# Altium PCB PCB1.PcbDoc
Units mil, origin at the board's own origin, x right, y up, seen from the top; angles counter-clockwise.
Board outline 1960.65 x 616 mil, 2 copper layers (Top Layer, Bottom Layer); 30 components, 31 nets, 157 pads, 75 vias.
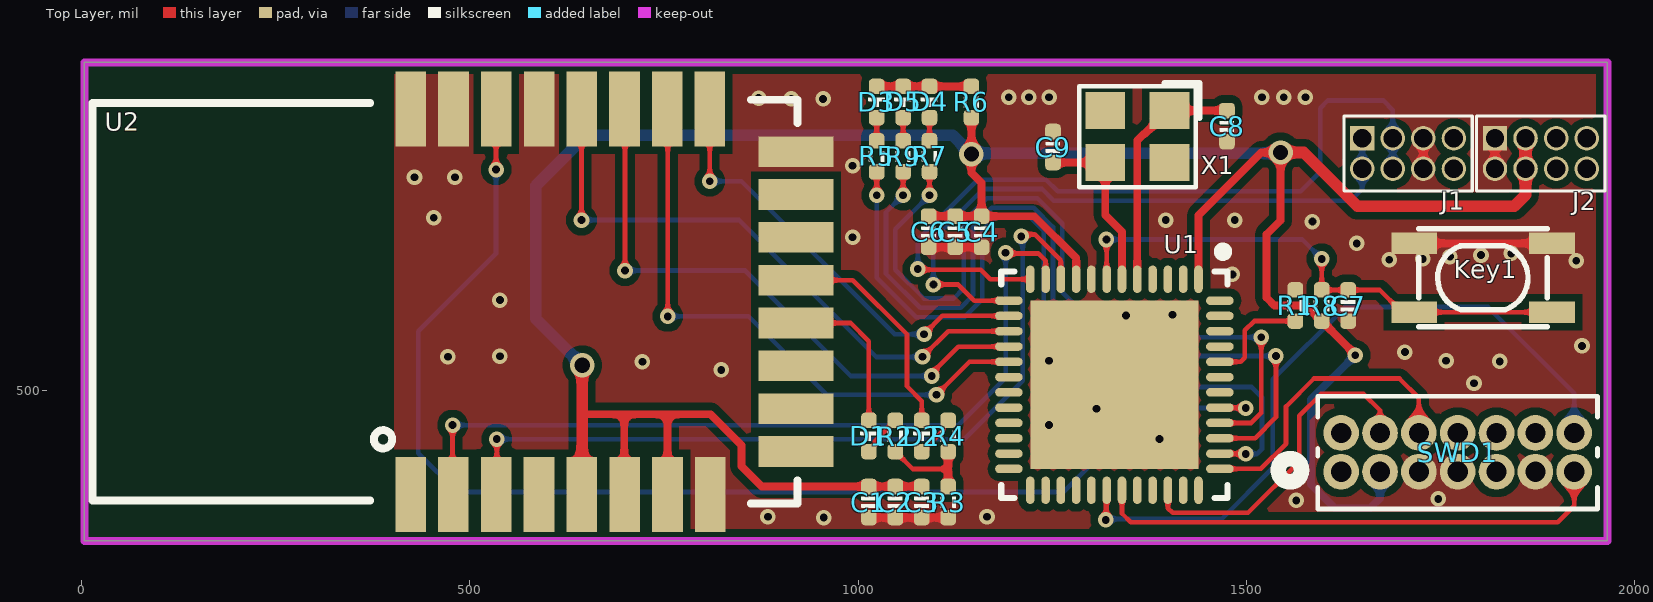
[diagram p0: Top Layer view]
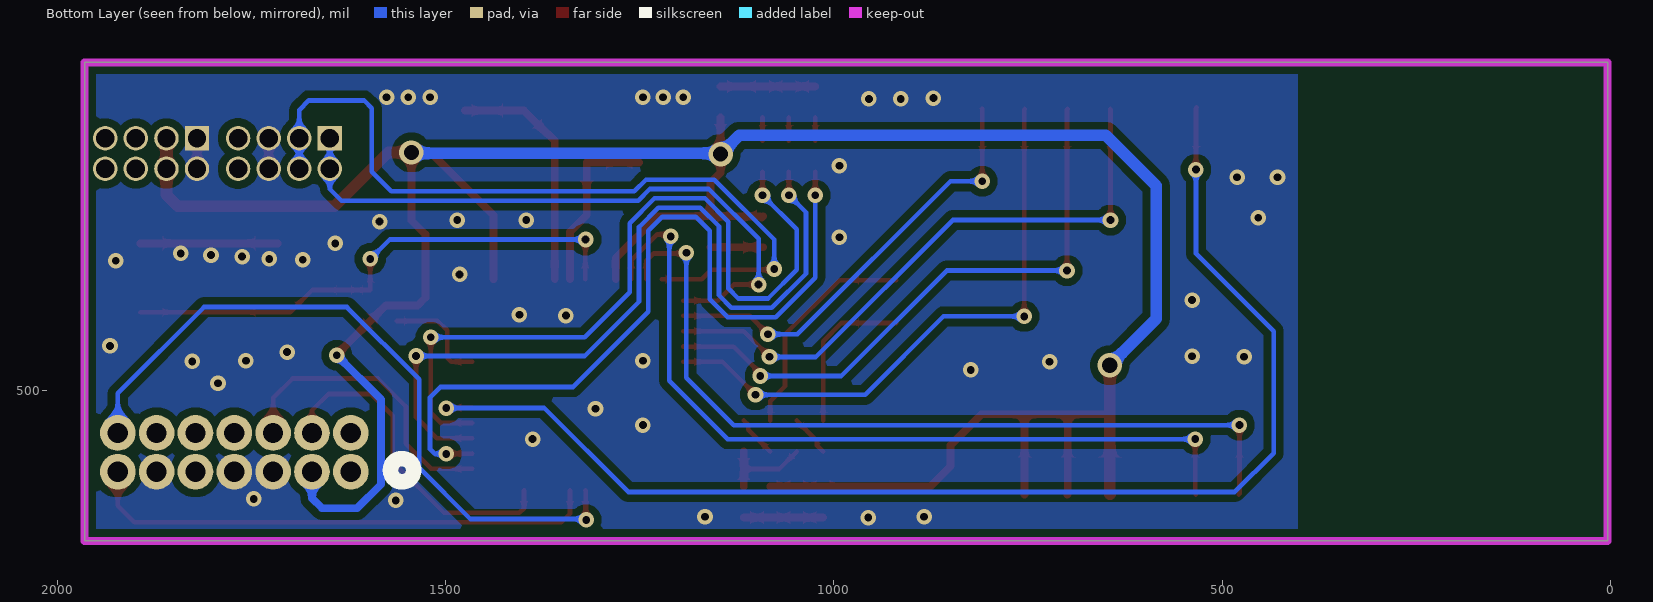
[diagram p1: Bottom Layer view, seen from below]
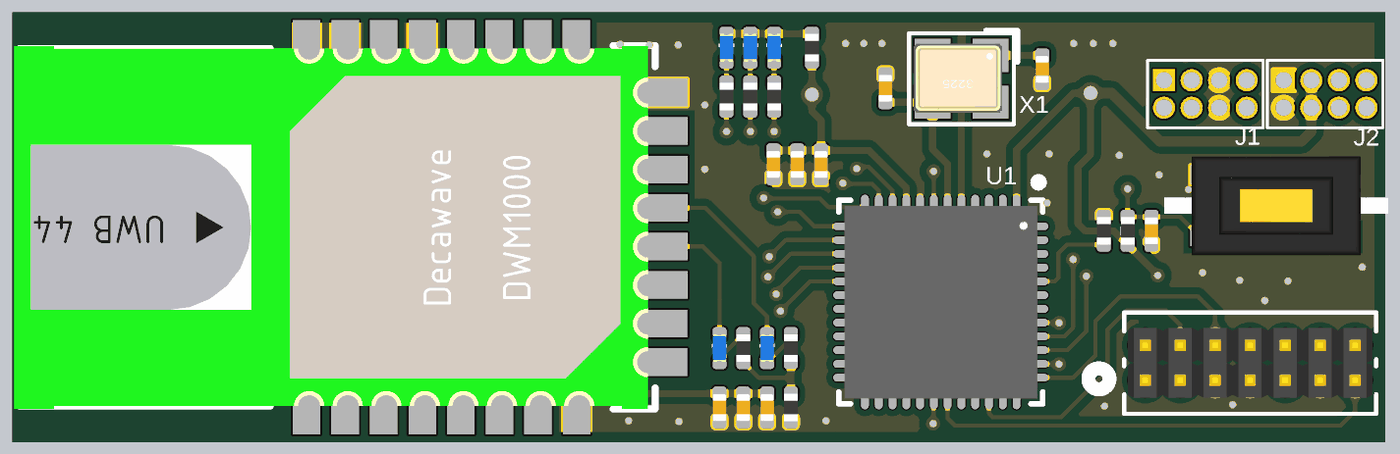
[diagram p2: 3D render of the assembled board from above, using the file's embedded part models]

## Layer stack, top to bottom
Top Solder: solder mask 0.4, Solder Resist, Dk 3.5
Top Layer: signal copper 1.4
Dielectric 1: dielectric 12.6, FR-4, Dk 4.8
Bottom Layer: signal copper 1.4
Bottom Solder: solder mask 0.4, Solder Resist, Dk 3.5

## Board outline
4,306 4,922 1964.65,922 1964.65,306

## Design rules (kind name [scope] priority, off if disabled: settings)
BoardOutlineClearance [All] p1: gap=0 ignorepadtopadclearanceinfootprint=FALSE
Clearance Polygon [(InPolygon)] p1: gap=10 ignorepadtopadclearanceinfootprint=TRUE
Clearance [All] p2: gap=5 ignorepadtopadclearanceinfootprint=TRUE except(6: Arc-Arc Arc-Track Track-Track; 9.84: Arc-Hole Track-Hole SMDPad-Hole THPad-Hole Via-Hole Fill-Hole Poly-Hole Region-Hole Text-Hole)
ComponentClearance [All] p1 off: gap=5 collisioncheckmode=3 verticalgap=5 showdistances=TRUE
DiffPairsRouting [All] p1: maxlimit=10 minlimit=5 mostfreqgap=5 toplayer_minwidth=5 toplayer_maxwidth=1000 toplayer_prefwidth=5 bottomlayer_minwidth=5 bottomlayer_maxwidth=1000 bottomlayer_prefwidth=5 maxuncoupledlength=500
Height [All] p1: minheight=0 maxheight=71497.94 prefheight=500
HoleSize [All] p1: absolutevalues=TRUE maxlimit=248.03 minlimit=7.87 maxpercent=80.000 minpercent=20.000
HoleToHoleClearance [All] p1: gap=10 allowstackedmicrovias=FALSE
MinimumAnnularRing [All] p1: minimumring=3
MinimumSolderMaskSliver [All] p1: minsoldermaskwidth=0
PlaneClearance [All] p1: clearance=5
PlaneConnect PlaneConnectPowerPads [InPadClass('PowerPads')] p1: planeconnectstyle=Direct reliefexpansion=20 reliefentries=4 reliefconductorwidth=10 reliefairgap=10
PlaneConnect [All] p2: pad.planeconnectstyle=Relief pad.reliefexpansion=11.81 pad.reliefentries=4 pad.reliefconductorwidth=5 pad.reliefairgap=5 via.planeconnectstyle=Direct via.reliefexpansion=11.81 via.reliefentries=4 via.reliefconductorwidth=5 via.reliefairgap=5
PolygonConnect PolygonConnect_via [isvia] p1: connectstyle=Direct reliefconductorwidth=10 reliefentries=4 polygonreliefangle="90 Angle" airgapwidth=10
PolygonConnect PolygonConnect_Direct [InNet('VBattery') or InNet('NetL1_1') or InNet('NetL1_2') or InNet('NetC2_2') or InNet('Vin')or InNet('NetC8_2')or InNet('VCC_5V') or InNet('NetR3_2') or InNet('NetL2_2')or InNet('VB')or InNet('VBLOAD') or InNet('V_Charge')or InNet('NetC7_2') or InNet('VCC_Supply') or InNet('GNDA')or InNet('GND')or InNet('NetD5_A')] p2: connectstyle=Direct reliefconductorwidth=10 reliefentries=4 polygonreliefangle="90 Angle" airgapwidth=10
PolygonConnect [All] p3: connectstyle=Relief reliefconductorwidth=10 reliefentries=4 polygonreliefangle="90 Angle" airgapwidth=10
RoutingVias [All] p1: holewidth=11.81 width=23.62 viastyle="Through Hole" minholewidth=7.87 minwidth=19.68 maxholewidth=23.62 maxwidth=259.84
SilkToSilkClearance [All] p1: silktosilkclearance=0
SilkToSolderMaskClearance [IsPad] p1: minsilkscreentomaskgap=0 clearancetoexposedcopper=TRUE
SolderMaskExpansion [All] p1: expansion=2.95 istentingtop=FALSE
Width [All] p1: maxlimit=1000 minlimit=5 preferedwidth=5 minimp=50.000000 maximp=50.000000 favimp=50.000000
20 further rules are at their usual default settings.

## Components (designator, comment, footprint, x,y, rotation, side; value= is the part's Value field where it differs from the comment)
C1 "100nF" CAP_0402 1014,356 r90 top value=0.1u
C2 "100nF" CAP_0402 1048,356 r90 top value=0.1u
C3 "10uF" CAP_0402 1082,356 r90 top value=0.1u
C4 "100nF" CAP_0402 1159,704 r90 top value=0.1u
C5 "100nF" CAP_0402 1125,704 r90 top value=0.1u
C6 "10uF" CAP_0402 1091,704 r90 top value=0.1u
C7 "100nF" CAP_0402 1631,609 r90 top value=0.1u
C8 "22pF" CAP_0402 1475,840 r90 top value=0.1u
C9 "22pF" CAP_0402 1251,813 r270 top value=0.1u
D1 "color?" LED_0402 1014,441 r270 top
D2 "color?" LED_0402 1082,441 r270 top
D3 "color?" LED_0402 1024,871 r270 top
D4 "color?" LED_0402 1092,871 r270 top
D5 "color?" LED_0402 1058,871 r270 top
J1 "排针/排母 1mm" 排针/排母1.0MM_4PX2 1625.38,852.91 r0 top
J2 "排针/排母 1mm" 排针/排母1.0MM_4PX2 1796.38,852.91 r0 top
Key1 "S-KEY-SMD-324225" KEY-SOP324225 1716,600.42 r180 top
R1 "10K" RES_0402 1563,609 r90 top value=22R
R2 "4.7K" RES_0402 1048,441 r270 top value=22R
R3 "0R" RES_0402 1116,356 r270 top value=22R
R4 "4.7K" RES_0402 1116,441 r270 top value=22R
R5 "2K" RES_0402 1024,801 r270 top value=22R
R6 "0R" RES_0402 1146,871 r90 top value=22R
R7 "2K" RES_0402 1092,801 r270 top value=22R
R8 "10K" RES_0402 1597,609 r90 top value=22R
R9 "2K" RES_0402 1058,801 r270 top value=22R
SWD1 "STDC14(SWD)" STDC14 1730,451 r0 top
U1 "STM32L431CCU6_UFQFPN48" UFQFPN-48_L7.0-W7.0-P0.50-BL-EP 1330,507 r180 top locked value=Value
U2 "DWM3000" DWM1000 672.01,613.95 r90 top
X1 "XTAL-4P" "OSC 3225-4P" 1359.66,826.46 r180 top

## Footprints (in the part's own frame and the unit in brackets; to place one, negate y for a bottom-side part, rotate by r counter-clockwise, add the part's x,y. Pads: shape width x height; smd on the part's side, far side on the other; paste and mask are expansions set on the pad)
CAP_0402 [mil]
  rrect50% 20x20 smd: 1(-20,0) 2(20,0)
  silkscreen extent -7,-9 7,9, body extent -20,-10 20,10, height 20
DWM1000 [mm]
  rect 2.45x1 smd: 1(-6.301,6.299) 2(-6.304,4.901) 3(-6.305,3.501) 4(-6.304,2.101) 5(-6.3,0.698) 6(-6.304,-0.702) 7(-6.301,-2.099) 8(-6.304,-3.5) 17(6.305,-3.488) 18(6.301,-2.093) 19(6.3,-0.693) 20(6.3,0.701) 21(6.299,2.1) 22(6.298,3.5) 23(6.3,4.898) 24(6.3,6.299)
  rect 1x2.45 smd: 9(-4.9,-6.295) 10(-3.497,-6.297) 11(-2.097,-6.299) 12(-0.697,-6.299) 13(0.703,-6.299) 14(2.103,-6.299) 15(3.503,-6.299) 16(4.903,-6.298)
  silkscreen extent -6.6,-6.35 6.6,16.7, body extent -6.6,-6.1 6.6,16.9, height 2.9
KEY-SOP324225 [mm]
  rect 1.5x0.7 smd: 1(-4.5,0) 1(0,0) 2(-4.5,-2.25) 2(0,-2.25)
  silkscreen extent -4.35,-2.73 -0.15,0.48, body extent -6.44,-2.93 1.7,0.67, height 2.49
LED_0402 [mil]
  rrect50% 20x20 smd: A(-20,0) K(20,0)
  silkscreen extent -6,-11 6,10, body extent -20,-10 20,10, height 18
"OSC 3225-4P" [mm]
  rect 1.3x1.2 smd: 1(-1.05,-0.85) 2(1.05,-0.85) 3(1.05,0.85) 4(-1.05,0.85)
  silkscreen extent -2.03,-1.75 1.91,1.65, body extent -1.47,-1.27 1.73,1.23, height 0.7
RES_0402 [mil]
  rrect50% 20x20 smd: 1(-20,0) 2(20,0)
  silkscreen extent -7,-10 7,10, body extent -20,-10 20,10, height 14
STDC14 [mil]
  round 46 hole 26: 1(-108,-56) 2(-108,-6) 3(-58,-56) 4(-58,-6) 5(-8,-56) 6(-8,-6) 7(42,-56) 8(42,-6) 9(92,-56) 10(92,-6) 11(142,-56) 12(142,-6) 13(192,-56) 14(192,-6)
  silkscreen extent -189,-104 222,41, body extent -133,-81 217,19, height 255
UFQFPN-48_L7.0-W7.0-P0.50-BL-EP [mil]
  oval 11x35.4 smd mask+2: 1(-108.3,-135.8) 2(-88.6,-135.8) 3(-68.9,-135.8) 4(-49.2,-135.8) 5(-29.5,-135.8) 6(-9.8,-135.8) 7(9.8,-135.8) 8(29.5,-135.8) 9(49.2,-135.8) 10(68.9,-135.8) 11(88.6,-135.8) 12(108.3,-135.8) 25(108.3,135.8) 26(88.6,135.8) 27(68.9,135.8) 28(49.2,135.8) 29(29.5,135.8) 30(9.8,135.8) 31(-9.8,135.8) 32(-29.5,135.8) 33(-49.2,135.8) 34(-68.9,135.8) 35(-88.6,135.8) 36(-108.3,135.8)
  oval 35.4x11 smd mask+2: 13(135.8,-108.3) 14(135.8,-88.6) 15(135.8,-68.9) 16(135.8,-49.2) 17(135.8,-29.5) 18(135.8,-9.8) 19(135.8,9.8) 20(135.8,29.5) 21(135.8,49.2) 22(135.8,68.9) 23(135.8,88.6) 24(135.8,108.3) 37(-135.8,108.3) 38(-135.8,88.6) 39(-135.8,68.9) 40(-135.8,49.2) 41(-135.8,29.5) 42(-135.8,9.8) 43(-135.8,-9.8) 44(-135.8,-29.5) 45(-135.8,-49.2) 46(-135.8,-68.9) 47(-135.8,-88.6) 48(-135.8,-108.3)
  rect 216.5x216.5 smd mask+2: 49(0,0)
  silkscreen extent -146,-177 146,146, body extent -138,-138 138,138, height 22
排针/排母1.0MM_4PX2 [mm] "1.0mm引脚间距排针/排母，直插式"
  rect 0.8x0.8 hole 0.6: 1(0.6,-0.725)
  round 0.8 hole 0.6: 2(1.6,-0.725) 3(2.6,-0.725) 4(3.6,-0.725) 5(3.6,-1.725) 6(2.6,-1.725) 7(1.6,-1.725) 8(0.6,-1.725)
  silkscreen extent 0,-2.45 4.2,0

## Part data
C1 C2 C3 C4 C5 C6 C7 C8 C9: library part 电容-0402, "Capacitor"
D1 D2 D3 D4 D5: library part LED_0402, "LED", Type=0402
J1 J2: "1mm间距"
Key1: library part KEY-SMD-324225, "KEY,SMD,324225"
R1 R2 R3 R4 R5 R6 R7 R8 R9: library part 电阻-0402, "Resistor"
SWD1: "For STLINK_V3SET"
U1: "STM32L431CCU6【C1337258】", Manufacturer_Part_Number=stm32l4_lqfp64_t7, Built_By=EMA_Jessica, Copyright="Copyright (C) 2016 Accelerated Designs. All rights reserved", RefDes=RefDes, Type=Type, Vendor=STMicroelectronics
X1: "4脚无源晶振"

## Via types
v1: diameter 20, hole 10, Top Layer to Bottom Layer, tented both sides, 72 vias
v2: diameter 31.5, hole 19.68, Top Layer to Bottom Layer, 3 vias

## Nets (pads, with @x,y where several pads share a name; then routed paths per layer and width w, separated by ;. In a path a pad name is that pad's centre, name@x,y a point inside that pad or via, vN(x,y) a via of type N, cw(c..) or ccw(c..) an arc to the next point about the centre after c; other vN are vias at no path point)
DW_IRQn: U1.41 U2.22 | length 1651.9
  Top Layer w6: U2.22@533,864 U2.22@534,863 ; v1(534,784) U2.22@534,863 ; U2.22 534.23,862.77 U2.22@534,863 ; U1.41 1466.05,477.25 1498.75,477.25 v1(1499,477)
  Bottom Layer w6: v1(534,784) 534,676 434,576 434,419 484,369 1265,369 1373.06,477.06 1498.94,477.06 v1(1499,477)
DW_LED1: D1.A U2.12 | length 205.7
  Top Layer w6: U2.12 990.49,586.51 1014,563 D1.A
DW_LED2: D2.A U2.13 | length 290.7
  Top Layer w6: U2.13 993.37,641.63 1063,572 1063,505 1082,486 D2.A
DW_MISO: U1.16 U2.19 | length 776.6
  Top Layer w6: U2.19 700,861.28 v1(700,654) ; v1(1095,518.27) 1095,522 1129.1,556.1 1194.1,556.1 U1.16
  Bottom Layer w6: v1(700,654) 855,654 990.73,518.27 v1(1095,518.27)
DW_MOSI: U1.17 U2.18 | length 765.9
  Top Layer w6: U2.18 755,861.44 v1(755,595) ; v1(1101,494) 1143.5,536.5 U1.17
  Bottom Layer w6: v1(755,595) 859,595 960,494 v1(1101,494)
DW_NSS: U1.14 U2.17 | length 569.9
  Top Layer w6: v1(809,769) 809,861.83 U2.17 ; v1(1085,572) 1108.6,595.6 U1.14
  Bottom Layer w6: v1(809,769) 850,769 1047,572 v1(1085,572)
DW_RSTn: U1.10 U2.3 | length 1056.8
  Top Layer w6: U2.3 535,366.56 v1(535,437) ; v1(1210,698) 1212.68,700.68 1227.32,700.68 1260.95,667.05 1260.95,642.95 U1.10
  Bottom Layer w6: v1(535,437) 1137,437 1212,512 1212,696 v1(1210,698)
DW_SCK: U1.15 U2.20 | length 780.2
  Top Layer w6: v1(644,719) 644,861.58 U2.20 ; v1(1083,543) 1115.95,575.95 1194.15,575.95 U1.15
  Bottom Layer w6: v1(644,719) 847,719 1023.27,542.73 1082.73,542.73 v1(1083,543)
DW_WUP: U1.11 U2.2 | length 1067.4
  Top Layer w6: v1(478,455) 478,366.85 U2.2 ; v1(1190,677) 1191,676 1232,676 1241.4,666.6 U1.11
  Bottom Layer w6: v1(478,455) 1129,455 1190,516 v1(1190,677)
GND: C1.1 C2.1 C3.1 C4.1 C5.1 C6.1 C7.1 C8.1 C9.1 J1.3 J1.6 J2.1 J2.8 Key1.2 R1.2 R3.2 SWD1.5 SWD1.7 SWD1.11 U1.8 U1.49 U2.8 U2.16 U2.21 U2.23 U2.24 | length 425.9
  Top Layer w10: C1.1 C2.1 C3.1 R3.2 ; C6.1 C5.1 C4.1 ; Key1.2@1716,689 Key1.2@1893.17,689 ; J1.6 J1.3 ; J2.8 J2.1
  other v1: 956,336 884,337 1166,337 1564,358 1747,360 1388,437 1246,455 1307,476 1793,509 824,526 722.44,536.51 1826,537 1246,538 1757,538 472,543 539.01,543.62 1704,549 1932,557 1345,596 1405,597 539,616 1482,649 1924.73,666.53 1684,668 1727,669 1762,672 1802,674 1841,676 1642,689 993,697 1585,717 1396,719 1485,719 453.77,721.98 429,774 481,774 993,789 914,875 955,875 872,876 1194,877 1220,877 1246,877 1520,877 1548,877 1576,877
LED1: R5.2 U1.38 | length 1039
  Top Layer w6: v1(1024,751) R5.2 ; U1.38 1466,418.2 1498.8,418.2 v1(1499,418)
  Bottom Layer w6: v1(1024,751) 1024,645 1075,594 1136.97,594 1160,617.03 1160,705 1178,723 1221.06,723 1239,705.06 1239,601 1336,504 1507,504 1520,491 1520,424 1514,418 v1(1499,418)
LED2: R7.2 U1.40 | length 1016.5
  Top Layer w6: v1(1092,751) R7.2 ; U1.40 1506.14,457.8 1519,470.66 v1(1519,568)
  Bottom Layer w6: v1(1092,751) 1048,707 1048,654.94 1084.94,618 1123,618 1136,631 1136,717 1166,747 1231,747 1263,715 1263,626 1321,568 v1(1519,568)
LED3: R9.2 U1.39 | length 1063.6
  Top Layer w6: v1(1058,751) R9.2 ; U1.39 1511.1,438.1 1538,465 v1(1538,544)
  Bottom Layer w6: v1(1058,751) 1036,729 1036,649.97 1079.97,606 1132,606 1148,622 1148,711 1172,735 1226.03,735 1251,710.03 1251,614 1321,544 v1(1538,544)
MCU_RST: C7.2 Key1.1 R8.2 U1.7 | length 686.9
  Top Layer w6: v1(1319.8,694) 1320,693.8 1320,643 U1.7 ; v1(1597,669) R8.2 C7.2 1671.67,629 1700.25,600.42 1716,600.42 Key1.1@1893.17,600.42
  Bottom Layer w6: v1(1319.8,694) 1572,694 v1(1597,669)
NetD1_K: D1.K R2.1 | length 54.1
  Top Layer w6: D1.K 1022,429 1022,435 R2.1
NetD2_K: D2.K R4.1 | length 54.1
  Top Layer w6: D2.K 1110.23,449.23 1110.23,455.23 R4.1
NetD3_A: D3.A D4.A D5.A R6.2 | length 122
  Top Layer w10: D3.A D5.A D4.A R6.2
NetD3_K: D3.K R5.1 | length 30
  Top Layer w6: R5.1 D3.K
NetD4_K: D4.K R7.1 | length 30
  Top Layer w6: R7.1 D4.K
NetD5_K: D5.K R9.1 | length 30
  Top Layer w6: R9.1 D5.K
NetR1_1: R1.1 U1.44 | length 139.4
  Top Layer w6: U1.44 1492.5,536.5 1498,542 1498,577 1510,589 R1.1
NetR2_2: R2.2 R3.1 R4.2 | length 122.3
  Top Layer w6: R2.2 1070.5,398.5 1116,398.5
  Top Layer w10: R3.1 1116,398.5 R4.2
OSC_IN: C8.2 U1.5 X1.1 | length 310.1
  Top Layer w10: U1.5 1359.5,821.4 1367.84,829.74 1368.84,829.74 1399.03,859.93 X1.1 1401.07,860 C8.2
OSC_OUT: C9.2 U1.6 X1.3 | length 226.4
  Top Layer w10: C9.2 X1.3 1318.32,725.56 1339.8,704.09 U1.6
SWCLK: SWD1.6 U1.37 | length 387.8
  Top Layer w6: U1.37 1518.7,398.7 1551,431 1551,479 1587,515 1697,515 1722,490 SWD1.6
SWDIO: SWD1.4 U1.34 | length 434.5
  Top Layer w6: U1.34 1399,371.1 1399,348 1405,342 1502,342 1568,408 1568,467 1596,495 1651.26,495 1672,474.25 SWD1.4
USART1_RX: SWD1.13 U1.31 | length 669.5
  Top Layer w6: U1.31 1339.8,341.2 1351,330 1901,330 1922,351 SWD1.13
USART1_TX: SWD1.14 U1.30 | length 918.9
  Top Layer w6: v1(1319,333) 1319.6,333.6 1319.6,370.6 U1.30
  Bottom Layer w6: v1(1319,333) 1320.13,334.13 1468.13,334.13 1534,400 1534,514 1627,607 1811,607 1922,496 SWD1.14
USART2_RX: J1.1 J1.8 U1.13 | length 821.1
  Top Layer w6: v1(1097,636) 1129,636 1149.7,615.3 U1.13
  Bottom Layer w6: v1(1097,636) 1097,694.97 1161.03,759 1237.03,759 1252.03,744 1634,744 1649,759 J1.8 J1.1
USART2_TX: J1.2 J1.7 U1.12 | length 1014.9
  Top Layer w6: v1(1077,656) 1078,655 1158,655 1170.2,642.8 U1.12
  Bottom Layer w6: v1(1077,656) 1077,694 1154,771 1242,771 1257,756 1570,756 1595,781 1595,863 1605,873 1676,873 1688.37,860.63 J1.2 J1.7
VCC_3V3: C1.2 C2.2 C3.2 C4.2 C5.2 C6.2 J2.2 J2.7 R6.1 R8.1 SWD1.3 U1.1 U1.9 U2.5 U2.6 U2.7 | length 3805.7
  Top Layer w10: 644.76,468.76 645,469 810,469 850,429 850,402 876,376 C1.2 C2.2 C3.2 ; 699,469 699,366.41 U2.6 ; U2.7 754.66,469 ; C6.2 1093,722 1095,724 C5.2 C4.2 ; R6.1 v2(1146,804) 1146,780 1159,767 C4.2 ; U1.9 1280.8,670.2 1227,724 C4.2 ; U1.1 1438.3,725.3 1519,806 v2(1544,806) 1544,718.59 1526,700.59 1526,619 1536,609 1577,609 1640,546 v1(1640,545)
  Top Layer w15: U2.5 644.76,366.17 644.76,468.76 644.76,531.76 v2(645,532) ; v2(1544,806) 1574,806 1643,737 1845,737 1859.37,751.37 J2.7 J2.2
  Bottom Layer w10: v2(1146,804) v2@1147,805 ; v2@1543,805 v2(1544,806) ; v1(1640,545) 1583,488 1583,379 1614,348 1659,348 1672,361 SWD1.3
  Bottom Layer w15: v2(645,532) 585,592 585,763 650,828 1122,828 v2(1146,804) ; v2@1147,805 v2@1543,805
pads on no net: J1.4 J1.5 J2.3 J2.4 J2.5 J2.6 SWD1.1 SWD1.2 SWD1.8 SWD1.9 SWD1.10 SWD1.12 U1.2 U1.3 U1.4 U1.18 U1.19 U1.20 U1.21 U1.22 U1.23 U1.24 U1.25 U1.26 U1.27 U1.28 U1.29 U1.32 U1.33 U1.35 U1.36 U1.42 U1.43 U1.45 U1.46 U1.47 U1.48 U2.1 U2.4 U2.9 U2.10 U2.11 U2.14 U2.15 X1.2 X1.4

## Polygon pours and split planes (outlines as drawn)
GND on Bottom Layer "GND_L02_P001" (solid, remove dead copper, pour order 1): 401.6,921.77 403,920.37 403,306 1964,306 1964,922
GND on Top Layer "GND_L01_P000" (solid, remove dead copper, pour order 0): 401.6,921.77 403,920.37 403,306 1964,306 1964,922

## Keep-outs
Keep-Out Layer:
  lines w10: 4,306 94,306 1965,306 1965,922 4,922 4,306

## Silkscreen, mask and mechanical layers (free items; w line width, h text height)
Mechanical 1:
  lines w3.94: 4,306 4,415 4,476 4,922 1964.65,922 1964.65,476 1964.65,402 1964.65,306 4,306
Drill Drawing:
  circle w10: c2226.62,528.83 r33.33
  lines w10: 2193.29,645.5 2259.96,645.5 2259.96,712.17 2193.29,712.17 2193.29,645.5 ; 2193.29,962.17 2209.96,962.17 2226.62,945.5 2243.29,962.17 2259.96,962.17 2243.29,978.83 2259.96,995.5 2243.29,995.5 2226.62,1012.17 2209.96,995.5 2193.29,995.5 2209.96,978.83 2193.29,962.17
  lines w15: 2133.5,450.5 12754.55,450.5 ; 2133.5,1050.5 12754.55,1050.5 ; 2684.38,300.5 2684.38,1200.5 ; 3274.22,300.5 3274.22,1200.5 ; 4373.9,300.5 4373.9,1200.5 ; 4879.78,300.5 4879.78,1200.5 ; 5613.58,300.5 5613.58,1200.5 ; 7113.13,300.5 7113.13,1200.5 ; 7702.98,300.5 7702.98,1200.5 ; 8448.78,300.5 8448.78,1200.5 ; 9188.57,300.5 9188.57,1200.5 ; 10042.33,300.5 10042.33,1200.5 ; 11375.94,300.5 11375.94,1200.5 ; 2133.5,300.5 12754.55,300.5 12754.55,1200.5 2133.5,1200.5 2133.5,300.5
  text "Symbol" at 2223.5,1095.5 h72
  text "Count" at 2729.38,1095.5 h72
  text "Hole Size" at 3319.22,1095.5 h72
  text "Plated" at 4418.9,1095.5 h72
  text "Hole Type" at 4924.78,1095.5 h72
  text "Drill Layer Pair" at 5658.58,1095.5 h72
  text "Via/Pad" at 7158.13,1095.5 h72
  text "Pad Shape" at 7747.98,1095.5 h72
  text "Template" at 8493.78,1095.5 h72
  text "Description" at 9233.57,1095.5 h72
  text "Hole Tolerance (+)" at 10087.33,1095.5 h72
  text "Hole Tolerance (-)" at 11420.94,1095.5 h72
  text "3" at 2729.38,945.5 h60
  text "19.69mil (0.500mm)" at 3319.22,945.5 h60
  text "PTH" at 4418.9,945.5 h60
  text "Round" at 4924.78,945.5 h60
  text "Top Layer - Bottom Layer" at 5658.58,945.5 h60
  text "Via" at 7158.13,945.5 h60
  text "Rounded" at 7747.98,945.5 h60
  text "v80h50m88" at 8493.78,945.5 h60
  text "14" at 2729.38,795.5 h60
  text "26.00mil (0.660mm)" at 3319.22,795.5 h60
  text "PTH" at 4418.9,795.5 h60
  text "Round" at 4924.78,795.5 h60
  text "Top Layer - Bottom Layer" at 5658.58,795.5 h60
  text "Pad" at 7158.13,795.5 h60
  text "Rounded" at 7747.98,795.5 h60
  text "c117h66" at 8493.78,795.5 h60
  text "A" at 2194.41,785.51 h66.67
  text "16" at 2729.38,645.5 h60
  text "23.62mil (0.600mm)" at 3319.22,645.5 h60
  text "PTH" at 4418.9,645.5 h60
  text "Round" at 4924.78,645.5 h60
  text "Top Layer - Bottom Layer" at 5658.58,645.5 h60
  text "Pad" at 7158.13,645.5 h60
  text "(Mixed)" at 7747.98,645.5 h60
  text "(Mixed)" at 8493.78,645.5 h60
  text "72" at 2729.38,495.5 h60
  text "10.00mil (0.254mm)" at 3319.22,495.5 h60
  text "PTH" at 4418.9,495.5 h60
  text "Round" at 4924.78,495.5 h60
  text "Top Layer - Bottom Layer" at 5658.58,495.5 h60
  text "Via" at 7158.13,495.5 h60
  text "Rounded" at 7747.98,495.5 h60
  text "v51h25m0mx0" at 8493.78,495.5 h60
  text "105 Total" at 2729.38,345.5 h60